# Altium PCB PCB2.PcbDoc
Units mm, origin at the board's own origin, x right, y up, seen from the top; angles counter-clockwise.
Board outline 97 x 49 mm, 2 copper layers (Top Layer, Bottom Layer); 30 components, 15 nets, 107 pads, 15 vias.
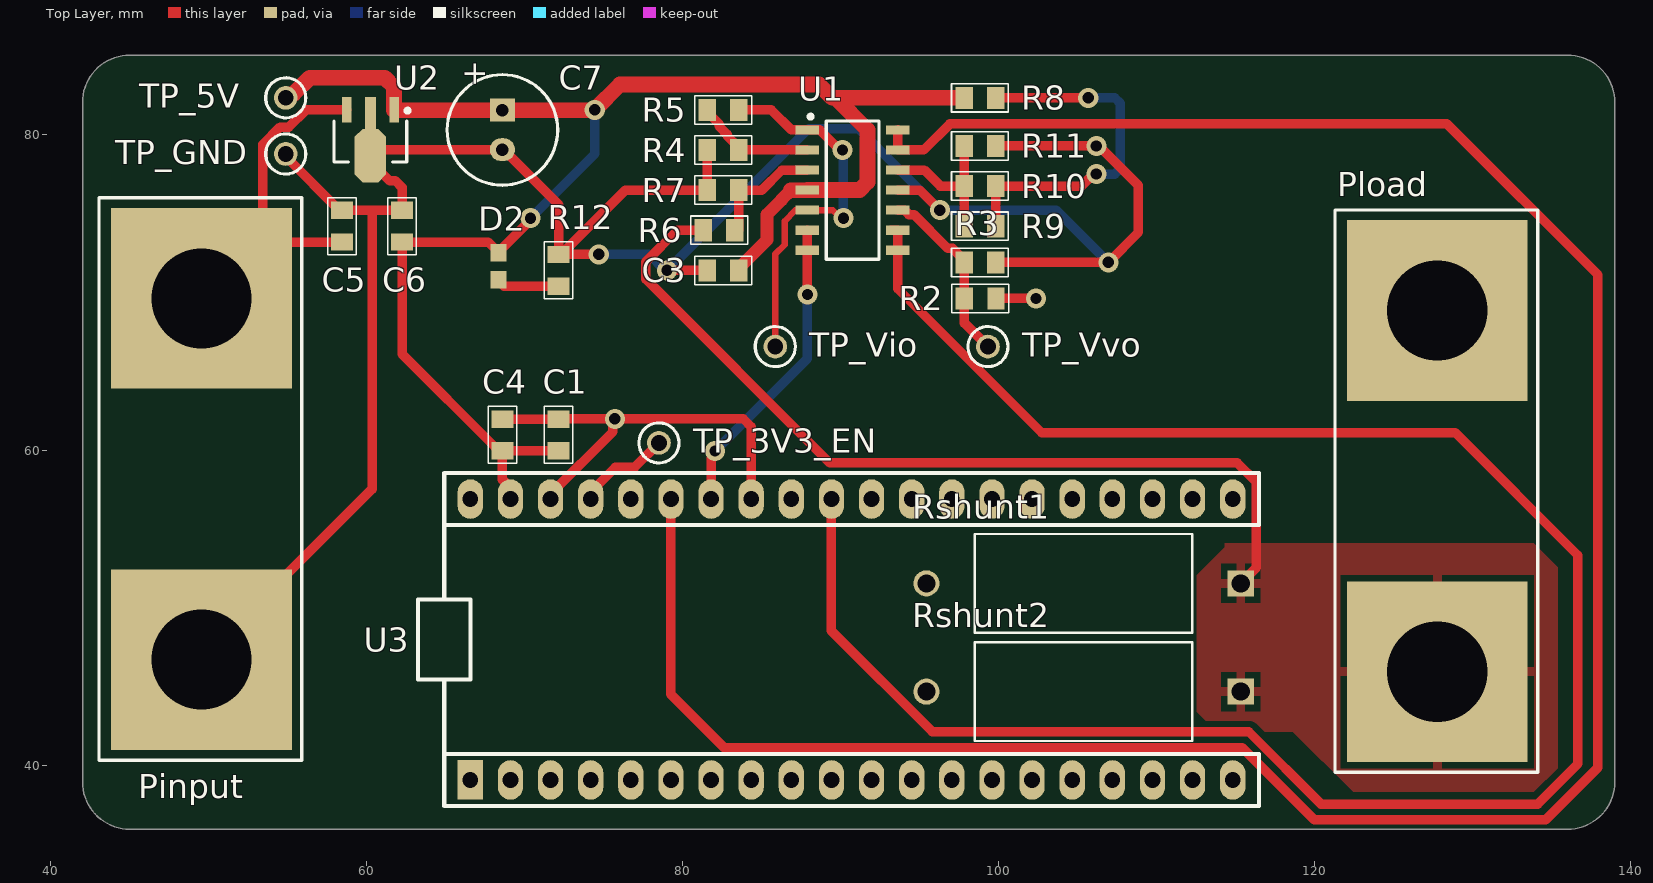
[diagram p0: Top Layer view]
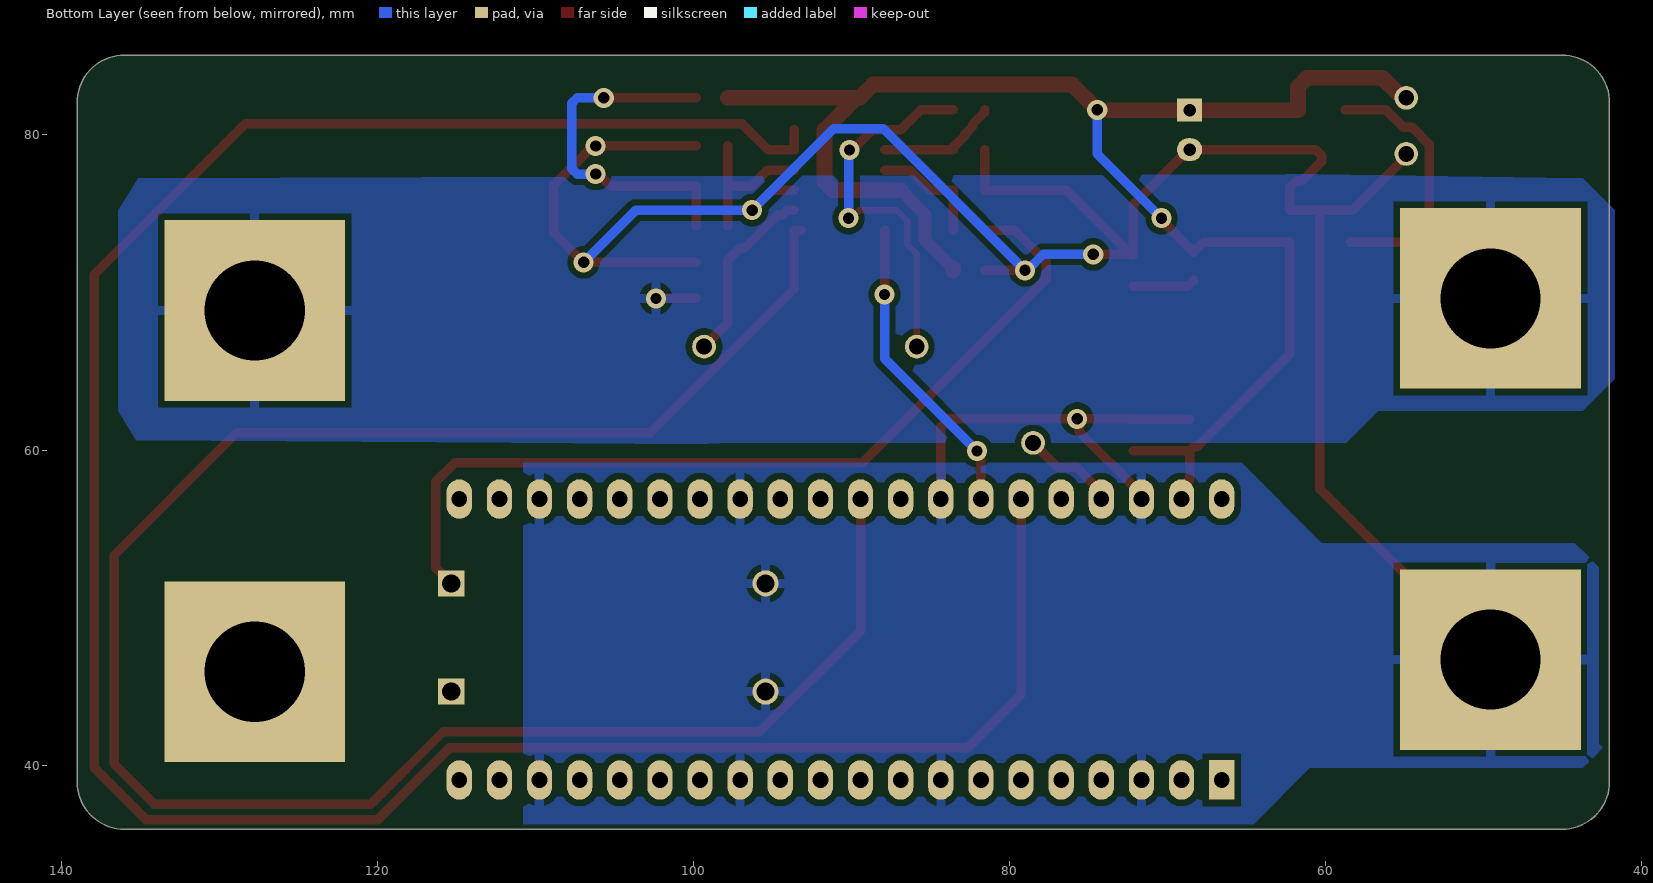
[diagram p1: Bottom Layer view, seen from below]

## Layer stack, top to bottom
Top Solder: solder mask 0.0102, Solder Resist, Dk 3.5
Top Layer: signal copper 0.0356
Dielectric 1: dielectric 0.32, FR-4, Dk 4.8
Bottom Layer: signal copper 0.0356
Bottom Solder: solder mask 0.0102, Solder Resist, Dk 3.5

## Board outline
42,39 42,82 cw(c45,82) 45,85 136,85 cw(c136,82) 139,82 139,39 cw(c136,39) 136,36 45,36 cw(c45,39)

## Design rules (kind name [scope] priority, off if disabled: settings)
Clearance [All] p1: gap=0.4 ignorepadtopadclearanceinfootprint=FALSE
Height [All] p1: minheight=0 maxheight=20 prefheight=12.7
HoleSize [All] p1: absolutevalues=TRUE maxlimit=10 minlimit=0.4 maxpercent=80.000 minpercent=20.000
PolygonConnect [All] p1: connectstyle=Relief reliefconductorwidth=0.6 reliefentries=4 polygonreliefangle="90 Angle" airgapwidth=0.4
RoutingVias [All] p1: holewidth=0.711 width=1.27 viastyle="Through Hole" minholewidth=0.711 minwidth=1.27 maxholewidth=0.711 maxwidth=1.27
SilkToSilkClearance [All] p1: silktosilkclearance=0.1
SilkToSolderMaskClearance [IsPad] p1: minsilkscreentomaskgap=0.1 clearancetoexposedcopper=TRUE
SolderMaskExpansion [All] p1: expansion=0.102 istentingtop=FALSE
SupplyNets "Schematic Supply Nets_7" [InNet('ADC_ref')] p1: voltage=0.000
SupplyNets "Schematic Supply Nets_6" [InNet('Vio')] p2: voltage=0.000
SupplyNets "Schematic Supply Nets_5" [InNet('VCC')] p3: voltage=0.000
SupplyNets "Schematic Supply Nets_4" [InNet('GND')] p4: voltage=0.000
SupplyNets "Schematic Supply Nets_1" [InNet('5V')] p5: voltage=0.000
SupplyNets "Schematic Supply Nets" [InNet('Vvo')] p6: voltage=0.000
Width [All] p1: maxlimit=100 minlimit=0.4 preferedwidth=0.6
26 further rules are at their usual default settings.

## Components (designator, comment, footprint, x,y, rotation, side; value= is the part's Value field where it differs from the comment)
C1 "100n" "0805 CAP" 72.136,60.96 r90 top
C3 "100n" "0805 CAP" 82.55,71.374 r180 top
C4 "100n" "0805 CAP" 68.58,60.96 r90 top
C5 "100n" "0805 CAP" 58.42,74.168 r90 top
C6 "1u" "0805 CAP" 62.23,74.168 r90 top
C7 "10u" "CAP-RAD-2.5mm Pitch" 68.58,80.264 r270 top
D2 "LTST-C191KRKT" 0603 68.326,71.628 r90 top
Pinput "Dual Banana Plugs" "Dual Banana Plug" 49.53,58.166 r270 top
Pload "Dual Banana Plugs" "Dual Banana Plug" 127.762,57.404 r270 top
R2 "10k" "0805 RES" 98.822,69.596 r0 top
R3 "1.5k" "0805 RES" 98.806,71.882 r180 top
R4 "1.2k" "0805 RES" 82.55,78.994 r0 top
R5 "10k" "0805 RES" 82.55,81.534 r0 top
R6 "1.2k" "0805 RES" 82.296,73.914 r0 top
R7 "10k" "0805 RES" 82.55,76.454 r0 top
R8 "680" "0805 RES" 98.806,82.296 r180 top
R9 "12k" "0805 RES" 98.806,74.168 r0 top
R10 "12k" "0805 RES" 98.806,76.708 r0 top
R11 "10k" "0805 RES" 98.806,79.248 r180 top
R12 "150" "0805 RES" 72.136,71.374 r270 top
Rshunt1 "ER74R10KT" RES_ER74_TYCO_TYC 115.316,51.562 r180 top
Rshunt2 "ER74R10KT" RES_ER74_TYCO_TYC 115.316,44.704 r180 top
TP_3V3_EN "5003" TP_TH 78.486,60.452 r90 top
TP_5V "5003" TP_TH 54.864,82.296 r90 top
TP_GND "5003" TP_TH 54.864,78.74 r90 top
TP_Vio "5003" TP_TH 85.852,66.548 r90 top
TP_Vvo "5003" TP_TH 99.314,66.548 r90 top
U1 "LM324DR2G" SOIC-14 90.744,76.454 r0 top
U2 "L78L05" SOT-89 60.222,79.534 r270 top
U3 "SC0918" "RP Pico Header V2" 66.548,39.116 r90 top

## Footprints (in the part's own frame and the unit in brackets; to place one, negate y for a bottom-side part, rotate by r counter-clockwise, add the part's x,y. Pads: shape width x height; smd on the part's side, far side on the other; paste and mask are expansions set on the pad)
0603 [mm]
  rect 1.1x1 smd: 1(-0.85,0) 2(0.85,0)
"0805 CAP" [mm] "http://www.digikey.co.nz/Web%20Export/Supplier%20Content/Vishay_8026/PDF/VishayBeyschlag_SolderPad.pdf?redirected=1 with dimension G modified by +0.25mm"
  rect 1.1x1.4 smd: 1(-1,0) 2(1,0)
  silkscreen extent -1.8,-0.9 1.8,0.9, body extent -1.04,-0.66 1.04,0.66, height 0.61
"0805 RES" [mm] "http://www.digikey.co.nz/Web%20Export/Supplier%20Content/Vishay_8026/PDF/VishayBeyschlag_SolderPad.pdf?redirected=1 with dimension G modified by +0.25mm"
  rect 1.1x1.4 smd: 1(-1,0) 2(1,0)
  silkscreen extent -1.8,-0.9 1.8,0.9, body extent -1.04,-0.66 1.04,0.66, height 0.61
"CAP-RAD-2.5mm Pitch" [mm] "Cap 6.3 X 11.2"
  rect 1.45x1.6 hole 0.8: 1(-1.25,0)
  oval 1.45x1.6 hole 0.8: 2(1.25,0)
  silkscreen extent -3.5,-3.5 3.5,3.5, body extent -3.15,-3.15 3.15,3.15, height 11.5
"Dual Banana Plug" [mm] "Connector; 2 Position"
  rect 11.43x11.43 hole 6.35: 1(-11.43,0) 2(11.43,0)
  silkscreen extent -17.8,-6.48 17.8,6.35, body extent -17.38,-5.99 17.43,5.99, height 5.5
RES_ER74_TYCO_TYC [mil]
  rect 65x65 / inner round 60 / far side rect 65x65 hole 45 paste-99999 mask+0: 1(0,0)
  round 65 / inner round 60 / far side round 65 hole 45 paste-99999 mask+0: 2(783.5,0)
  silkscreen extent 121,-123 663,123, body extent -17,-118 801,118, height 236
"RP Pico Header V2" [mm]
  rect 2.5x1.6 hole 1: 1(0,0)
  oval 2.5x1.6 hole 1: 2(0,-2.54) 3(0,-5.08) 4(0,-7.62) 5(0,-10.16) 6(0,-12.7) 7(0,-15.24) 8(0,-17.78) 9(0,-20.32) 10(0,-22.86) 11(0,-25.4) 12(0,-27.94) 13(0,-30.48) 14(0,-33.02) 15(0,-35.56) 16(0,-38.1) 17(0,-40.64) 18(0,-43.18) 19(0,-45.72) 20(0,-48.26) 21(17.78,-48.26) 22(17.78,-45.72) 23(17.78,-43.18) 24(17.78,-40.64) 25(17.78,-38.1) 26(17.78,-35.56) 27(17.78,-33.02) 28(17.78,-30.48) 29(17.78,-27.94) 30(17.78,-25.4) 31(17.78,-22.86) 32(17.78,-20.32) 33(17.78,-17.78) 34(17.78,-15.24) 35(17.78,-12.7) 36(17.78,-10.16) 37(17.78,-7.62) 38(17.78,-5.08) 39(17.78,-2.54) 40(17.78,0)
  silkscreen extent -1.65,-49.91 19.43,3.3, body extent -1.61,-49.66 19.39,2.67, height 12.6
SOIC-14 [mm] "SOIC, 14-Leads, Body 8.75x4mm, Pitch 1.27mm"
  rect 1.48x0.58 smd: 1(-2.86,3.81) 2(-2.86,2.54) 3(-2.86,1.27) 4(-2.86,0) 5(-2.86,-1.27) 6(-2.86,-2.54) 7(-2.86,-3.81) 8(2.86,-3.81) 9(2.86,-2.54) 10(2.86,-1.27) 11(2.86,0) 12(2.86,1.27) 13(2.86,2.54) 14(2.86,3.81)
  silkscreen extent -2.78,-4.37 1.67,4.77, body extent -3.1,-4.38 3.1,4.37, height 1.75
SOT-89 [mm] "SOT89, 3-Leads, Body 4.5x2.4 mm, Pitch 1.5mm, Lead Span 4.1mm, IPC Low Density"
  rect 1.6x0.6 smd: 1(-2,1.5) 3(-2,-1.5)
  rect 2x0.7 smd: 2(-1.8,0)
  oct 3.4x2 smd: 2(0.9,0)
  silkscreen extent -2.07,-2.3 1.3,2.48, body extent -2.25,-2.29 2,2.29, height 1.6
TP_TH [mm] "Test Point, Through Hole, Dia 2.54mm"
  round 1.5 hole 1: 1(0,0)
  silkscreen extent -1.27,-1.27 1.27,1.27, body extent -1.27,-1.27 1.27,1.27, height 4.57

## Part data
C1 C3 C4 C5 C6: library part CerCap_SMT_0805, "SMT ceramic capacitor 0805 size"
C7: library part ElecCap_TH_2P0, "Electrolytic capacitor with radial package, 2mm pitch and 5.2mm diameter", LatestRevisionDate=17-Jul-2002, LatestRevisionNote="Re-released for DXP Platform.", PackageDescription="Polarized Capacitor; 2 Leads", PackageReference=POLAR0.8, Published=8-Jun-2000, Publisher="Altium Limited"
D2: "http://octopart.com/ltst-c190krkt-lite-on-549893", Package=None, Availability=Unavailable, MP=LTST-C191KRKT, Price=None
Pinput Pload: library part AC_Output, "Dual banana plugs connection to the AC load", LatestRevisionDate=17-Jul-2002, LatestRevisionNote="Re-released for DXP Platform.", Publisher="Altium Limited"
R2 R3 R4 R5 R6 R7 R8 R9 R10 R11 R12: library part Res_SMT_0805, "0805 resistor", ComponentLink1Description=https://nz.mouser.com/datasheet/2/315/AOA0000C304-1149620.pdf, LatestRevisionDate=17-Jul-2002, LatestRevisionNote="Re-released for DXP Platform.", PackageReference=AXIAL-0.4, Published=8-Jun-2000, Publisher="Altium Limited"
Rshunt1 Rshunt2: "No Description Available", Mfr_Name="TE Connectivity", Digi-Key_Part_Number_1=A105885CT-ND, Digi-Key_Part_Number_2=A105885TB-ND
TP_3V3_EN TP_5V TP_GND TP_Vio TP_Vvo: library part TestPoint, "Test Point, Orange, 1-Pin THD, RoHS", Forward Current="3 A", Forward Voltage="1.08 V", Max Operating Temperature="150 degC", Max Surge Current="80 A", Min Operating Temperature="-65 degC", Package Quantity=500, Peak Reverse Current="600 uA", ComponentLink1Description="Manufacturer URL", ComponentLink1URL=http://www.keyelco.com/, ComponentLink2Description=Datasheet, ComponentLink2URL=http://keyelco.com/userAssets/file/M65p56.pdf, DatasheetVersion=Jun-15, Diameter="5.3 mm", Height="0.25 inch", Length="9.5 mm", Mount="Through Hole", PackageDescription="1-Pin Through Hole Device, Dia 2.54 mm", PackageReference=5003, Packaging=Bulk, Pins=2, Radiation Hardening=No, REACH SVHC="No SVHC", RoHSCompliant=true, Weight="0.01 lb", Width="0.25 inch"
U1: library part LM324DR_SMT_SOIC16, "Single Supply Quad Operational Amplifier, 3 to 32 V, 0 to 70 degC, 14-Pin SOIC, Pb-Free, Tape and Reel", Manufacturer="On Semiconductor", ComponentLink1Description="Manufacturer URL", ComponentLink1URL=http://www.onsemi.com/, ComponentLink2Description=Datasheet, ComponentLink2URL=http://www.onsemi.cn/pub_link/Collateral/LM324-D.PDF, ComponentLink3Description="Package Specification", ComponentLink3URL=http://www.onsemi.com/pub_link/Collateral/751A-03.PDF, DatasheetVersion="Rev. 25", Mounting Technology="Surface Mount", PackageDescription="14-Pin Small Outline Integrated Circuit, Body 8.65 x 3.9 mm, Pitch 1.27 mm", PackageReference=SOIC-14-751A-03, PackageVersion="Rev. K, 05/2011", Packing="Tape and Reel", PartNumber=LM324DR2G, RoHS=TRUE, VCC Max (V)=32, VCC Min (V)=3
U2: library part L78L05_SMT_SOT89, "LDO Voltage Regulator 5V", Supplier Part Number 1=497-1181-1-ND, ComponentLink1Description=http://www.st.com/content/ccc/resource/technical/document/datasheet/99/3b/7d/91/91/51/4b/be/CD00000544.pdf/files/CD00000544.pdf/jcr:content/translations/en.CD00000544.pdf, ComponentLink1URL=http://www.st.com/content/ccc/resource/technical/document/datasheet/99/3b/7d/91/91/51/4b/be/CD00000544.pdf/files/CD00000544.pdf/jcr:content/translations/en.CD00000544.pdf, Supplier 1=Digi-Key
U3: "RP2040 Raspberry Pi Pico - ARMÂ® CortexÂ®-M0+ MCU 32-Bit Embedded Evaluation Board", Package=None, Availability="In Stock", Check_prices=https://www.snapeda.com/parts/SC0918/Raspberry+Pi/view-part/?ref=eda, MF="Raspberry Pi", MP=SC0918, Price=None, Purchase-URL=https://pricing.snapeda.com/search/part/SC0918/?ref=eda, SnapEDA_Link=https://www.snapeda.com/parts/SC0918/Raspberry+Pi/view-part/?ref=snap

## Via types
v1: diameter 1.27, hole 0.711, Top Layer to Bottom Layer, 15 vias

## Nets (pads, with @x,y where several pads share a name; then routed paths per layer and width w, separated by ;. In a path a pad name is that pad's centre, name@x,y a point inside that pad or via, vN(x,y) a via of type N, cw(c..) or ccw(c..) an arc to the next point about the centre after c; other vN are vias at no path point)
5V: C1.1 C3.1 C4.1 C6.1 C7.1 D2.2 R8.2 TP_5V.1 U1.4 U2.1 U3.39 | length 104.4
  Top Layer w0.6: D2.2 D2.2@68.326,72.528 ; U3.39 69.088,57.617 68.58,58.125 C4.1 ; v1(70.358,74.676) 70.358,74.56 D2.2@68.326,72.528 ; C1.1 C4.1 ; D2.2@68.326,72.528 67.686,73.168 C6.1 62.23,66.07 68.09,60.21 68.33,60.21 C4.1
  Top Layer w0.8: C3.1@83.55,71.524 85.327,73.301 85.327,74.913 86.244,75.83 86.244,75.847 86.841,76.444
  Top Layer w1: TP_5V.1 54.999,82.296 55.249,82.546 55.358,82.546 56.378,83.566 61.136,83.566 61.722,82.98 61.722,81.514 C7.1 v1@74.422,81.514 ; v1(74.422,81.534) 76.022,83.134 88.614,83.134 89.452,82.296 R8.2 ; C3.1 C3.1@83.55,71.524 ; 86.841,76.444 U1.4@87.644,76.444 ; U1.4 91.186,76.454 91.694,76.962 91.694,80.264 89.662,82.296
  Bottom Layer w0.6: v1(70.358,74.676) 74.422,78.74 v1(74.422,81.534)
ADC_ref: R9.1 R10.1 R11.2 U1.12 | length 9.7
  Top Layer w0.6: U1.12 95.287,77.724 96.303,76.708 R10.1 ; R9.1 R10.1 ; R11.2 R10.1
ADC_ref_buff: U1.13 U1.14 U3.35 | length 157.1
  Top Layer w0.6: U3.35 79.248,44.528 82.628,41.148 115.426,41.148 119.982,36.592 134.611,36.592 137.922,39.903 137.922,71.094 128.368,80.648 96.904,80.648 95.25,78.994 U1.13 U1.14
GND: C1.2 C3.2 C4.2 C5.2 C6.2 C7.2 Pinput.2 R3.1 R4.1 R7.1 R11.1 R12.1 Rshunt1.2 Rshunt2.2 TP_GND.1 U1.11 U2.2 U3.3 U3.8 U3.13 U3.18 U3.23 U3.28 U3.33 U3.38 | length 175.3
  Top Layer w0.6: Pinput.2 60.325,57.531 60.325,75.168 ; TP_GND.1 54.864,78.574 58.27,75.168 C5.2 60.325,75.168 ; C4.2 C1.2 72.144,61.968 75.684,61.968 v1(75.692,61.976) ; U3.38 71.628,57.212 75.564,61.148 75.564,61.848 v1(75.692,61.976) ; R12.1@72.286,72.374 76.366,76.454 R7.1 R4.1 ; v1(74.676,72.39) 74.668,72.382 72.144,72.382 R12.1 72.136,75.533 68.655,79.014 C7.2 60.602,79.014 60.222,78.634 60.222,78.258 61.438,77.042 61.806,77.042 62.23,76.618 C6.2 60.325,75.168 ; v1(78.994,71.374) C3.2 ; U3.33 84.328,61.468 83.82,61.976 v1(75.692,61.976) ; U1.11 94.996,76.454 v1(96.266,75.184) ; R3.1 v1(106.934,71.882) 108.842,73.79 108.842,76.753 106.347,79.248 v1(106.172,79.248) R11.1
  Bottom Layer w0.6: v1(74.676,72.39) 77.839,72.39 78.855,71.374 v1(78.994,71.374) 87.955,80.335 91.115,80.335 v1(96.266,75.184) 103.632,75.184 v1(106.934,71.882) ; U3.33@84.328,56.446 U3.33
NetD2_1: D2.1 R12.2 | length 4
  Top Layer w0.6: D2.1 68.326,70.728 68.68,70.374 R12.2
NetR4_2: R4.2 R5.1 U1.2 | length 7.7
  Top Layer w0.6: R5.1 81.55,81.384 82.3,80.634 82.3,80.484 82.8,79.984 82.8,79.894 83.55,79.144 R4.2 U1.2
NetR6_2: R6.2 R7.2 U1.3 | length 7.4
  Top Layer w0.6: R6.2@83.55,73.914 R7.2 85,76.454 86.26,77.714 87.874,77.714 U1.3
NetR8_1: R8.1 R9.2 R10.2 | length 23
  Top Layer w0.6: R9.2 R10.2 105.229,76.708 105.991,77.47 v1(106.172,77.47) ; R8.1 v1(105.664,82.296)
  Bottom Layer w0.6: v1(105.664,82.296) 107.345,82.296 107.696,81.945 107.696,77.821 107.345,77.47 v1(106.172,77.47)
NetTP_3V3_EN_1: TP_3V3_EN.1 U3.37 | length 6.1
  Top Layer w0.6: U3.37 74.168,57.346 75.731,58.909 76.943,58.909 TP_3V3_EN.1
VCC: C5.1 Pinput.1 Pload.1 R2.2 U2.3 | length 20.4
  Top Layer w0.6: C5.1 53.102,73.168 53.414,73.48 53.414,79.341 54.511,80.437 55.056,80.437 56.153,81.534 U2.3 ; R2.2 v1(102.362,69.596)
Vio: R5.2 TP_Vio.1 U1.1 U1.5 | length 24.4
  Top Layer w0.4: TP_Vio.1 85.852,72.412 86.444,73.004 86.444,74.494 87.124,75.174 89.491,75.174 89.989,74.676 v1(90.17,74.676)
  Top Layer w0.6: R5.2 85.598,81.534 86.868,80.264 88.668,80.264 89.932,79 v1(90.113,79)
  Bottom Layer w0.6: v1(90.113,79) 90.142,78.972 90.142,74.704 v1(90.17,74.676)
Vio_buff: U1.6 U1.7 U3.34 | length 19.5
  Top Layer w0.6: U3.34 81.788,59.509 82.042,59.763 v1(82.042,59.944) ; v1(87.884,69.85) U1.7 U1.6
  Bottom Layer w0.6: v1(82.042,59.944) 87.884,65.786 v1(87.884,69.85)
Vis: Pload.2 R6.1 Rshunt1.1 Rshunt2.1 | length 58.4
  Top Layer w0.6: R6.1@81.55,73.914 79.646,73.914 77.659,71.927 77.659,70.821 89.298,59.182 115.093,59.182 116.308,57.967 116.308,52.554 Rshunt1.1 ; Pload.2@126.492,44.704 Pload.2
Vvo: R2.1 R3.2 TP_Vvo.1 U1.10 | length 11.6
  Top Layer w0.6: U1.10 94.034,75.184 94.314,74.904 94.634,74.904 96.77,72.768 97.07,72.768 97.806,72.032 R3.2 97.814,71.874 97.814,69.604 R2.1 97.822,68.04 TP_Vvo.1
Vvo_buff: U1.8 U1.9 U3.31 | length 128.6
  Top Layer w0.6: U3.31 89.408,48.554 95.798,42.164 115.824,42.164 120.396,37.592 134.112,37.592 136.652,40.132 136.652,53.34 128.899,61.093 102.718,61.093 93.604,70.207 U1.8 U1.9 U1.9@93.174,73.914
pads on no net: U3.1 U3.2 U3.4 U3.5 U3.6 U3.7 U3.9 U3.10 U3.11 U3.12 U3.14 U3.15 U3.16 U3.17 U3.19 U3.20 U3.21 U3.22 U3.24 U3.25 U3.26 U3.27 U3.29 U3.30 U3.32 U3.36 U3.40

## Polygon pours and split planes (outlines as drawn)
Vis on Top Layer "VIS_L01_P004" (solid, pour order 4): 112.522,52.07 114.3,53.848 114.3,54.102 133.858,54.102 135.382,52.578 135.382,39.624 134.112,38.354 122.428,38.354 118.618,42.164 113.792,42.164 112.522,43.434
GND on Bottom Layer "GND_L02_P005" (solid, pour order 5): 110.744,36.322 85.598,36.322 64.516,36.322 60.96,39.878 43.688,39.878 42.418,41.148 42.672,41.402 42.672,52.578 44.196,54.102 60.198,54.102 65.278,59.182 110.744,59.182
VCC on Bottom Layer "VCC_L02_P003" (solid, pour order 3): 43.942,77.216 43.688,77.216 41.656,75.184 41.656,64.516 43.688,62.484 56.642,62.484 58.674,60.452 97.536,60.452 99.821,60.364 111.506,60.452 135.24,60.631 136.398,62.484 136.398,75.184 135.128,77.216 62.484,77.47 60.452,77.47

## Silkscreen, mask and mechanical layers (free items; w line width, h text height)
Board Outline:
  the board outline again, w0.254

## Text inside footprints (layer, text, board x,y; h text height)
C7: Top Overlay "+" at 66.18,84.664 h1.5 r270